# Altium PCB PCB_Minitek127-16pin.PcbDoc
Units mm, origin at the board's own origin, x right, y up, seen from the top; angles counter-clockwise.
Board outline 37 x 15.4 mm, 2 copper layers (Top Layer, Bottom Layer); 2 components, 16 nets, 38 pads, 31 vias.
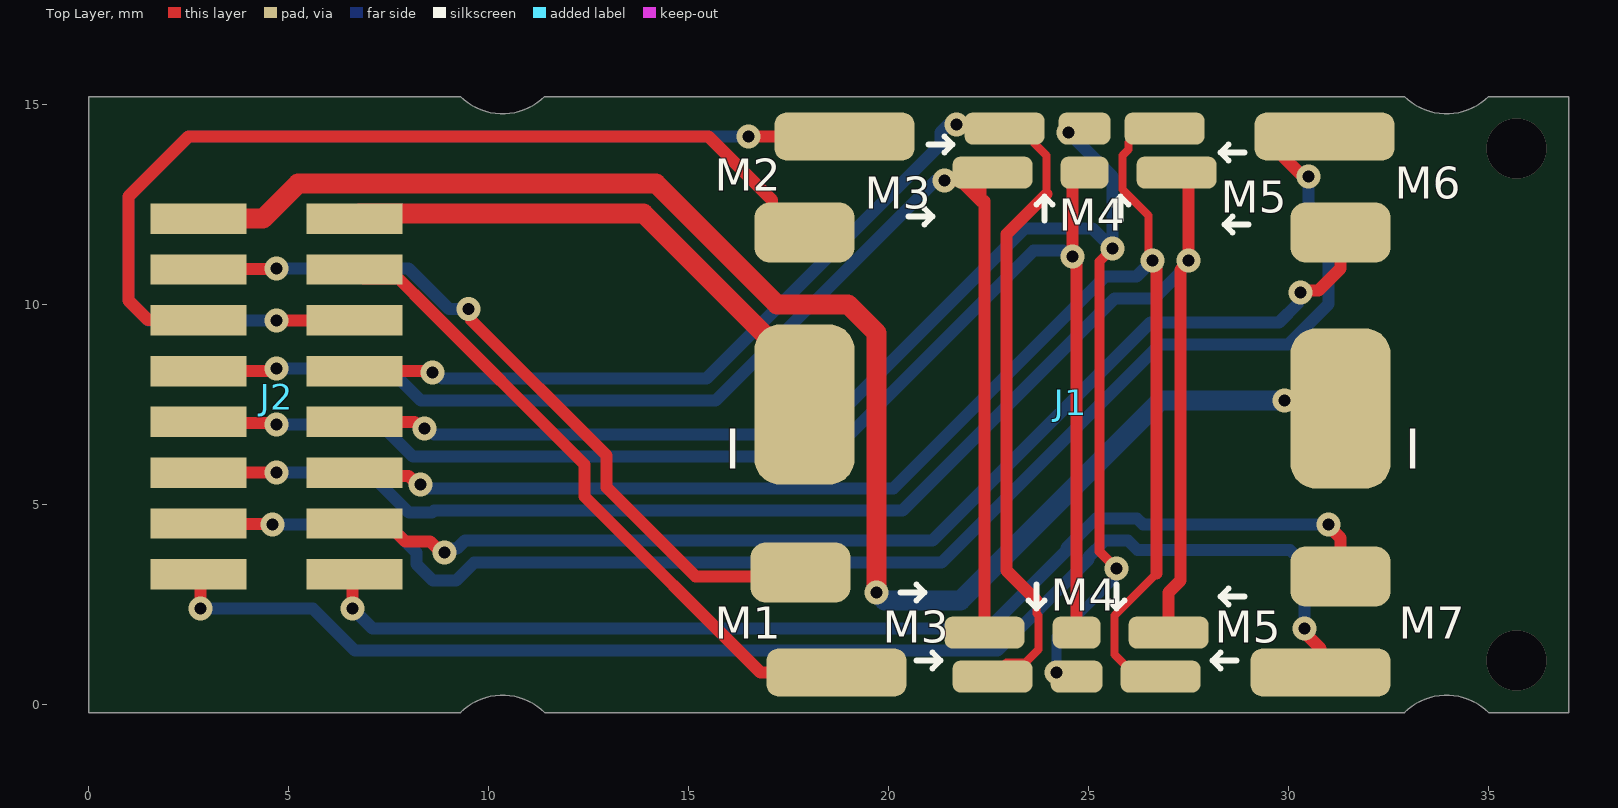
[diagram p0: Top Layer view]
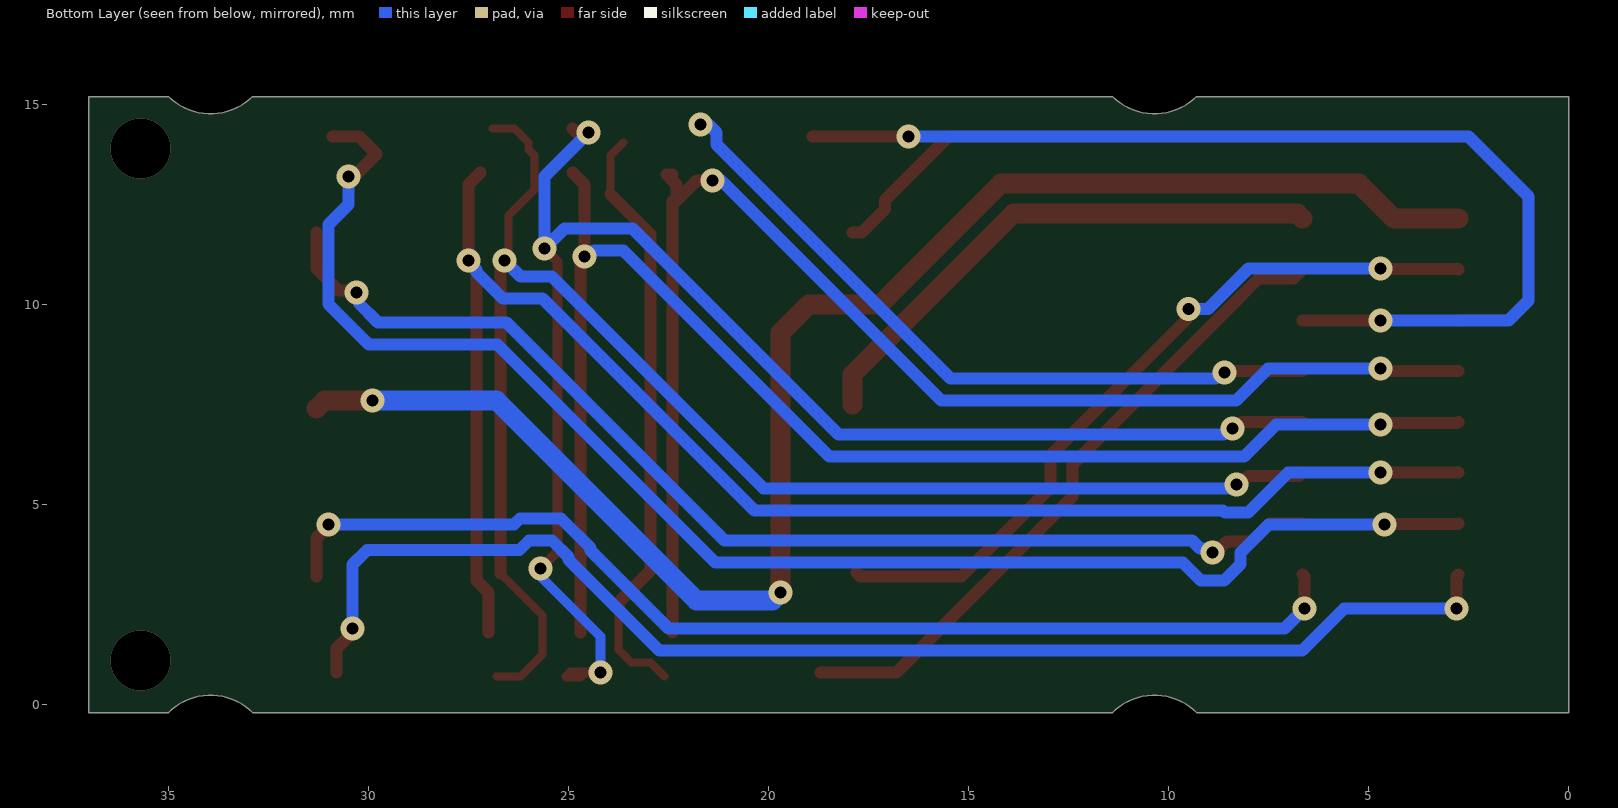
[diagram p1: Bottom Layer view, seen from below]

## Layer stack, top to bottom
Top Solder: solder mask 0.01, Solder Resist, Dk 3.5
Top Layer: signal copper 0.036
Dielectric 1: dielectric 0.32, FR-4, Dk 4.8
Bottom Layer: signal copper 0.036
Bottom Solder: solder mask 0.01, Solder Resist, Dk 3.5

## Board outline
0,-0.2 0,15.2 9.3,15.2 ccw(c10.35,16.25) 11.4,15.2 32.9,15.2 ccw(c33.95,16.25) 35,15.2 37,15.2 37,-0.2 35,-0.2 ccw(c33.95,-1.25) 32.9,-0.2 11.4,-0.2 ccw(c10.35,-1.25) 9.3,-0.2

## Design rules (kind name [scope] priority, off if disabled: settings)
Clearance [All] p1: gap=0.25 ignorepadtopadclearanceinfootprint=FALSE except(0: Arc-Hole Track-Hole SMDPad-Hole THPad-Hole Via-Hole Fill-Hole Poly-Hole Region-Hole Text-Hole)
HoleSize [All] p1: absolutevalues=TRUE maxlimit=6.3 minlimit=0.2 maxpercent=80.000 minpercent=20.000
MinimumAnnularRing [All] p1: minimumring=0.13
MinimumSolderMaskSliver [All] p1 off: minsoldermaskwidth=0.254
PolygonConnect [All] p1: connectstyle=Relief reliefconductorwidth=0.254 reliefentries=4 polygonreliefangle="90 Angle" airgapwidth=0.254
RoutingVias [All] p1: holewidth=0.3 width=0.6 viastyle="Through Hole" minholewidth=0.2 minwidth=0.45 maxholewidth=6.3 maxwidth=6.7
SilkToSilkClearance [All] p1: silktosilkclearance=0.15
SilkToSolderMaskClearance [IsPad] p1: minsilkscreentomaskgap=0.15 clearancetoexposedcopper=TRUE
SolderMaskExpansion [All] p1: expansion=0.102 istentingtop=FALSE useseparateexpansions=TRUE expansionbottom=0.102 istentingbottom=TRUE
Width [All] p1: maxlimit=0.5 minlimit=0.15 preferedwidth=0.3 minimp=50.000000 maximp=50.000000 favimp=50.000000
26 further rules are at their usual default settings.

## Classes and differential pairs
net class [1..16]: 1 2 3 4 5 6 7 8 9 10 11 12 13 14 15 16

## Components (designator, comment, footprint, x,y, rotation, side; value= is the part's Value field where it differs from the comment)
J1 "sample_contact_place" sample 24.6,7.4 r0 top
J2 "20021221-00016C4LF" 2002122100016C4LF 4.7,7.7 r90 top

## Footprints (in the part's own frame and the unit in brackets; to place one, negate y for a bottom-side part, rotate by r counter-clockwise, add the part's x,y. Pads: shape width x height; smd on the part's side, far side on the other; paste and mask are expansions set on the pad)
2002122100016C4LF [mm]
  rect 0.76x2.4 smd: 1(4.445,1.95) 2(4.445,-1.95) 3(3.175,1.95) 4(3.175,-1.95) 5(1.905,1.95) 6(1.905,-1.95) 7(0.635,1.95) 8(0.635,-1.95) 9(-0.635,1.95) 10(-0.635,-1.95) 11(-1.905,1.95) 12(-1.905,-1.95) 13(-3.175,1.95) 14(-3.175,-1.95) 15(-4.445,1.95) 16(-4.445,-1.95)
  body extent -6.67,-3.07 6.67,3.07, height 5.9
sample [mm]
  rrect50% 2.5x4 smd: 1(-6.7,0.1) 2(6.7,0)
  rrect50% 2.5x1.5 smd: 3(-6.8,-4.1) 5(-6.7,4.4) 14(6.7,4.4) 16(6.7,-4.2)
  rrect50% 3.5x1.2 smd: 4(-5.9,-6.6) 6(-5.7,6.8) 13(6.3,6.8) 15(6.2,-6.6)
  rrect50% 2x0.8 smd: 7(-2.2,-5.6) 7(-2,5.9) 8(-2,-6.7) 8(-1.7,7) 11(2.4,-5.6) 11(2.6,5.9) 12(2.2,-6.7) 12(2.3,7)
  rrect50% 1.2x0.8 smd: 9(0.1,-5.6) 9(0.3,5.9)
  rrect50% 1.3x0.8 smd: 10(0.1,-6.7) 10(0.3,7)
  silkscreen extent -4.3,-6.5 4.4,6.8, body extent -5,-4.9 5,5.1, height 1

## Part data
J2: "Connector", Manufacturer_Name=Amphenol, Height=5.8mm, Manufacturer_Part_Number=20021221-00016C4LF

## Via types
v1: diameter 0.6, hole 0.3, Top Layer to Bottom Layer, tented bottom, 29 vias
v2: diameter 1.5, hole 1.5, Top Layer to Bottom Layer, tented bottom, 2 vias

## Nets (pads, with @x,y where several pads share a name; then routed paths per layer and width w, separated by ;. In a path a pad name is that pad's centre, name@x,y a point inside that pad or via, vN(x,y) a via of type N, cw(c..) or ccw(c..) an arc to the next point about the centre after c; other vN are vias at no path point)
1: J1.2 J2.1 | length 39.2
  Top Layer w0.5: J2.1 4.363,12.145 5.243,13.025 14.186,13.025 17.211,10 18.991,10 19.7,9.291 19.7,5.709 v1(19.7,2.8) ; v1(29.9,7.6) 31.1,7.6 J1.2
  Bottom Layer w0.5: v1(19.7,2.8) 19.9,2.6 21.8,2.6 26.8,7.6 v1(29.9,7.6)
2: J1.1 J2.2 | length 13.7
  Top Layer w0.5: J2.2 6.78,12.275 13.875,12.275 17.9,8.25 J1.1
3: J1.3 J2.3 | length 18.9
  Top Layer w0.3: J2.3 2.762,10.887 4.687,10.887 v1(4.7,10.9) ; v1(9.503,9.888) 9.56,9.831 9.56,9.618 12.951,6.226 12.951,5.426 15.178,3.2 17.7,3.2 J1.3
  Bottom Layer w0.3: v1(4.7,10.9) 8,10.9 9.012,9.888 v1(9.503,9.888)
4: J1.4 J2.4 | length 16.7
  Top Layer w0.3: J2.4 6.88,10.645 7.756,10.645 8.003,10.398 8.25,10.151 ; 8.25,10.15 12.401,5.999 12.401,5.199 16.8,0.8 J1.4
5: J1.5 J2.5 | length 23.2
  Top Layer w0.3: J2.5 2.743,9.612 1.488,9.612 1,10.1 1,12.7 2.5,14.2 15.5,14.2 17.088,12.612 17.088,12.383 17.671,11.8 J1.5
6: J1.6 J2.6 | length 27
  Top Layer w0.3: v1(4.7,9.6) 6.645,9.6 J2.6 ; v1(16.5,14.2) J1.6
  Bottom Layer w0.3: v1(4.7,9.6) 1.5,9.6 1,10.1 1,12.7 2.5,14.2 v1(16.5,14.2)
7: J1.7 J2.7 | length 34.7
  Top Layer w0.3: J2.7 4.554,8.335 4.619,8.4 v1(4.7,8.4) ; v1(21.4,13.1) 21.79,13.1 22.3,12.59 22.3,13 22.4,13.1 22.548,13.248 J1.7@22.4,13.248 ; J1.7@22.4,1.8 22.4,12.59 ; 22.4,12.445 22.4,12.59 ; 22.4,12.445 22.4,12.59 ; 22.4,12.445 22.4,12.59 ; 22.4,12.445 22.4,12.59
  Bottom Layer w0.3: v1(4.7,8.4) 7.51,8.4 8.31,7.6 15.678,7.6 21.178,13.1 v1(21.4,13.1)
8: J1.8 J2.8 | length 33
  Top Layer w0.2: J1.8@22.6,0.7 22.95,1.05 23.428,1.05 23.7,1.322 23.75,1.372 23.75,2.228 23.7,2.278 23.7,2.6 ; J1.8@23.628,14.05 23.95,13.728 23.95,12.872 23.95,12.761
  Top Layer w0.3: J2.8 8.565,8.335 v1(8.6,8.3) ; v1@21.581,14.5 v1(21.7,14.5) ; 23.7,2.6 22.95,3.35 22.95,11.761 23.95,12.761
  Bottom Layer w0.3: v1(8.6,8.3) 8.681,8.3 8.831,8.15 15.45,8.15 21.3,14 21.3,14.3 21.5,14.5 v1(21.7,14.5)
9: J1.9 J2.9 | length 36.1
  Top Layer w0.3: J2.9 2.782,7.033 4.668,7.033 v1(4.7,7) ; J1.9@24.7,1.8 24.7,11.019 24.6,11.119 24.6,13 J1.9@24.9,13.3
  Bottom Layer w0.3: v1(4.7,7) 7.31,7 8.11,6.2 18.1,6.2 18.478,6.2 23.628,11.35 24.369,11.35 24.519,11.2 v1(24.6,11.2)
10: J1.10 J2.10 | length 39.7
  Top Layer w0.25: v1(24.2,0.8) J1.10@24.95,0.8 ; J1.10@24.7,0.7 J1.10@25.05,0.7 ; v1(25.6,11.4) 25.275,11.075 25.275,3.824 v1(25.7,3.399) ; J1.10@24.7,0.8 J1.10@24.95,0.8 ; J1.10@24.7,0.8 J1.10@24.95,0.8 ; J1.10@24.7,0.8 J1.10@24.95,0.8 ; J1.10@24.7,0.8 J1.10@24.95,0.8 ; J1.10@24.7,0.8 J1.10@24.95,0.8 ; J1.10@24.95,0.7 J1.10@25.05,0.7 ; J1.10@24.95,0.7 J1.10@25.05,0.7 ; J1.10@24.95,0.7 J1.10@25.05,0.7 ; J1.10@24.95,0.7 J1.10@25.05,0.7 ; J1.10@24.95,0.7 J1.10@25.05,0.7 ; J1.10@24.95,0.8 J1.10@25.05,0.7
  Top Layer w0.3: J2.10 8.154,7.065 8.319,6.9 v1(8.4,6.9) ; v1(24.5,14.3) 24.8,14.3 J1.10@24.9,14.4
  Bottom Layer w0.25: v1(24.2,0.8) 24.2,1.697 25.7,3.197 v1(25.7,3.399)
  Bottom Layer w0.3: v1(8.4,6.9) 8.481,6.9 8.631,6.75 18.25,6.75 23.4,11.9 25.1,11.9 v1(25.6,11.4) 25.6,13.2 v1(24.5,14.3)
11: J1.11 J2.11 | length 39.7
  Top Layer w0.3: J2.11 2.753,5.798 4.698,5.798 v1(4.7,5.8) ; J1.11@27,1.8 27,2.8 27.3,3.1 27.3,10.862 27.5,11.062 27.5,12.7 27.5,13 J1.11@27.2,13.3
  Bottom Layer w0.3: v1(4.7,5.8) 7.01,5.8 7.6,5.21 7.71,5.1 8.01,4.8 8.59,4.8 8.64,4.85 20.35,4.85 21,5.5 25.65,10.15 26.64,10.15 27.3,10.81 27.3,10.862 27.5,11.062 v1(27.5,11.1)
12: J1.12 J2.12 | length 38.5
  Top Layer w0.2: v1(26.6,11.1) 26.5,11.2 26.5,12.222 25.85,12.872 25.85,13.728 26,13.878 26,14.046 26.354,14.4 J1.12@26.9,14.4 ; 26.7,3.278 25.65,2.228 25.65,1.25 26.2,0.7 J1.12@26.8,0.7
  Top Layer w0.3: J2.12 6.726,5.719 8,5.719 8.219,5.5 v1(8.3,5.5) ; v1(26.6,11.1) 26.6,11.019 26.7,10.919 26.7,3.278
  Bottom Layer w0.3: v1(8.3,5.5) 8.381,5.5 8.481,5.4 20.122,5.4 24.872,10.15 25.422,10.7 26.2,10.7 v1(26.6,11.1)
13: J1.13 J2.13 | length 37.5
  Top Layer w0.3: J2.13 2.762,4.513 4.588,4.513 v1(4.6,4.5) ; v1(30.5,13.2) 30.361,13.2 29.8,13.761 30.239,14.2 J1.13
  Bottom Layer w0.3: v1(4.6,4.5) 7.495,4.5 8.2,3.795 8.2,3.51 8.61,3.1 9.19,3.1 9.64,3.55 21.328,3.55 21.378,3.6 26.778,9 29.99,9 31,10.01 31,12 30.5,12.5 v1(30.5,13.2)
14: J1.14 J2.14 | length 28.9
  Top Layer w0.3: J2.14 7.47,4.525 7.919,4.076 8.543,4.076 8.819,3.8 v1(8.9,3.8) ; v1(30.3,10.3) 30.35,10.35 30.75,10.35 31.3,10.9 J1.14
  Bottom Layer w0.3: v1(8.9,3.8) 9,3.9 9.212,3.9 9.412,4.1 20.268,4.1 21.1,4.1 26.55,9.55 29.762,9.55 30.243,10.03 30.243,10.243 v1(30.3,10.3)
15: J1.15 J2.15 | length 33.3
  Top Layer w0.3: J2.15 2.8,3.205 v1(2.8,2.4) ; v1(30.4,1.9) 30.3,1.9 30.8,1.4 J1.15
  Bottom Layer w0.3: v1(2.8,2.4) 5.61,2.4 6.66,1.35 22.728,1.35 25,3.622 25,3.688 25.41,4.099 25.476,4.099 25.99,4.099 26.227,3.861 30.039,3.861 30.4,3.5 v1(30.4,1.9)
16: J1.16 J2.16 | length 28.1
  Top Layer w0.3: v1(6.6,2.4) 6.6,3.205 J2.16 ; v1(31,4.5) 31,4.464 31.3,4.164 J1.16
  Bottom Layer w0.3: v1(6.6,2.4) 7.1,1.9 22.5,1.9 24.45,3.85 24.45,3.916 25.182,4.649 25.249,4.649 26.218,4.649 26.366,4.5 v1(31,4.5)
copper on no net:
  other v2: 35.7,1.1 35.7,13.9

## Silkscreen, mask and mechanical layers (free items; w line width, h text height)
Mechanical 1:
  lines w0.1: 11.4,-0.2 0,-0.2 0,15.2 11.4,15.2 ; 13.5,-0.2 32.9,-0.2 ; 13.5,15.2 32.9,15.2 ; 35,-0.2 37,-0.2 37,11.1 37,15.2 35,15.2
Mechanical 2:
  lines w0.1: 11.4,-0.2 cw(c12.45,-1.25) 13.5,-0.2 11.4,-0.2 ; 11.4,15.2 ccw(c12.45,16.25) 13.5,15.2 11.4,15.2 ; 32.9,-0.2 cw(c33.95,-1.25) 35,-0.2 32.9,-0.2 ; 32.9,15.2 ccw(c33.95,16.25) 35,15.2 32.9,15.2

## Text inside footprints (layer, text, board x,y; h text height)
J1: Top Overlay "M5" at 28.15,1.55 h0.8; Top Overlay "M7" at 32.75,1.65 h0.8; Top Overlay "M6" at 32.65,12.65 h0.8; Top Overlay "M4" at 24.25,11.85 h0.8; Top Overlay "M3" at 19.4,12.4 h0.8; Top Overlay "M1" at 15.65,1.65 h0.8; Top Overlay "M2" at 15.65,12.85 h0.8; Top Overlay "M3" at 19.85,1.55 h0.8; Top Overlay "M4" at 24.05,2.35 h0.8; Top Overlay "M5" at 28.3,12.3 h0.8; Top Overlay "I" at 15.9,5.9 h1; Top Overlay "I" at 32.9,5.9 h1